# Altium PCB 175-00003, rev 2, Sinistro ASP.PcbDoc (part 2 of 5)
Units mil, origin at the board's own origin, x right, y up, seen from the top; angles counter-clockwise.
Board outline 5905.51 x 4330.71 mil, 8 copper layers (Top Layer (.GTL), MidLayer1 (.G1), +28V and VCC (.GP1), A and D grounds (.GP2), Earth GND (.GP3), +5ANA (.GP4), -5ANA (.GP5), Bottom Layer (.GBL)); 381 components, 275 nets, 1751 pads, 519 vias.
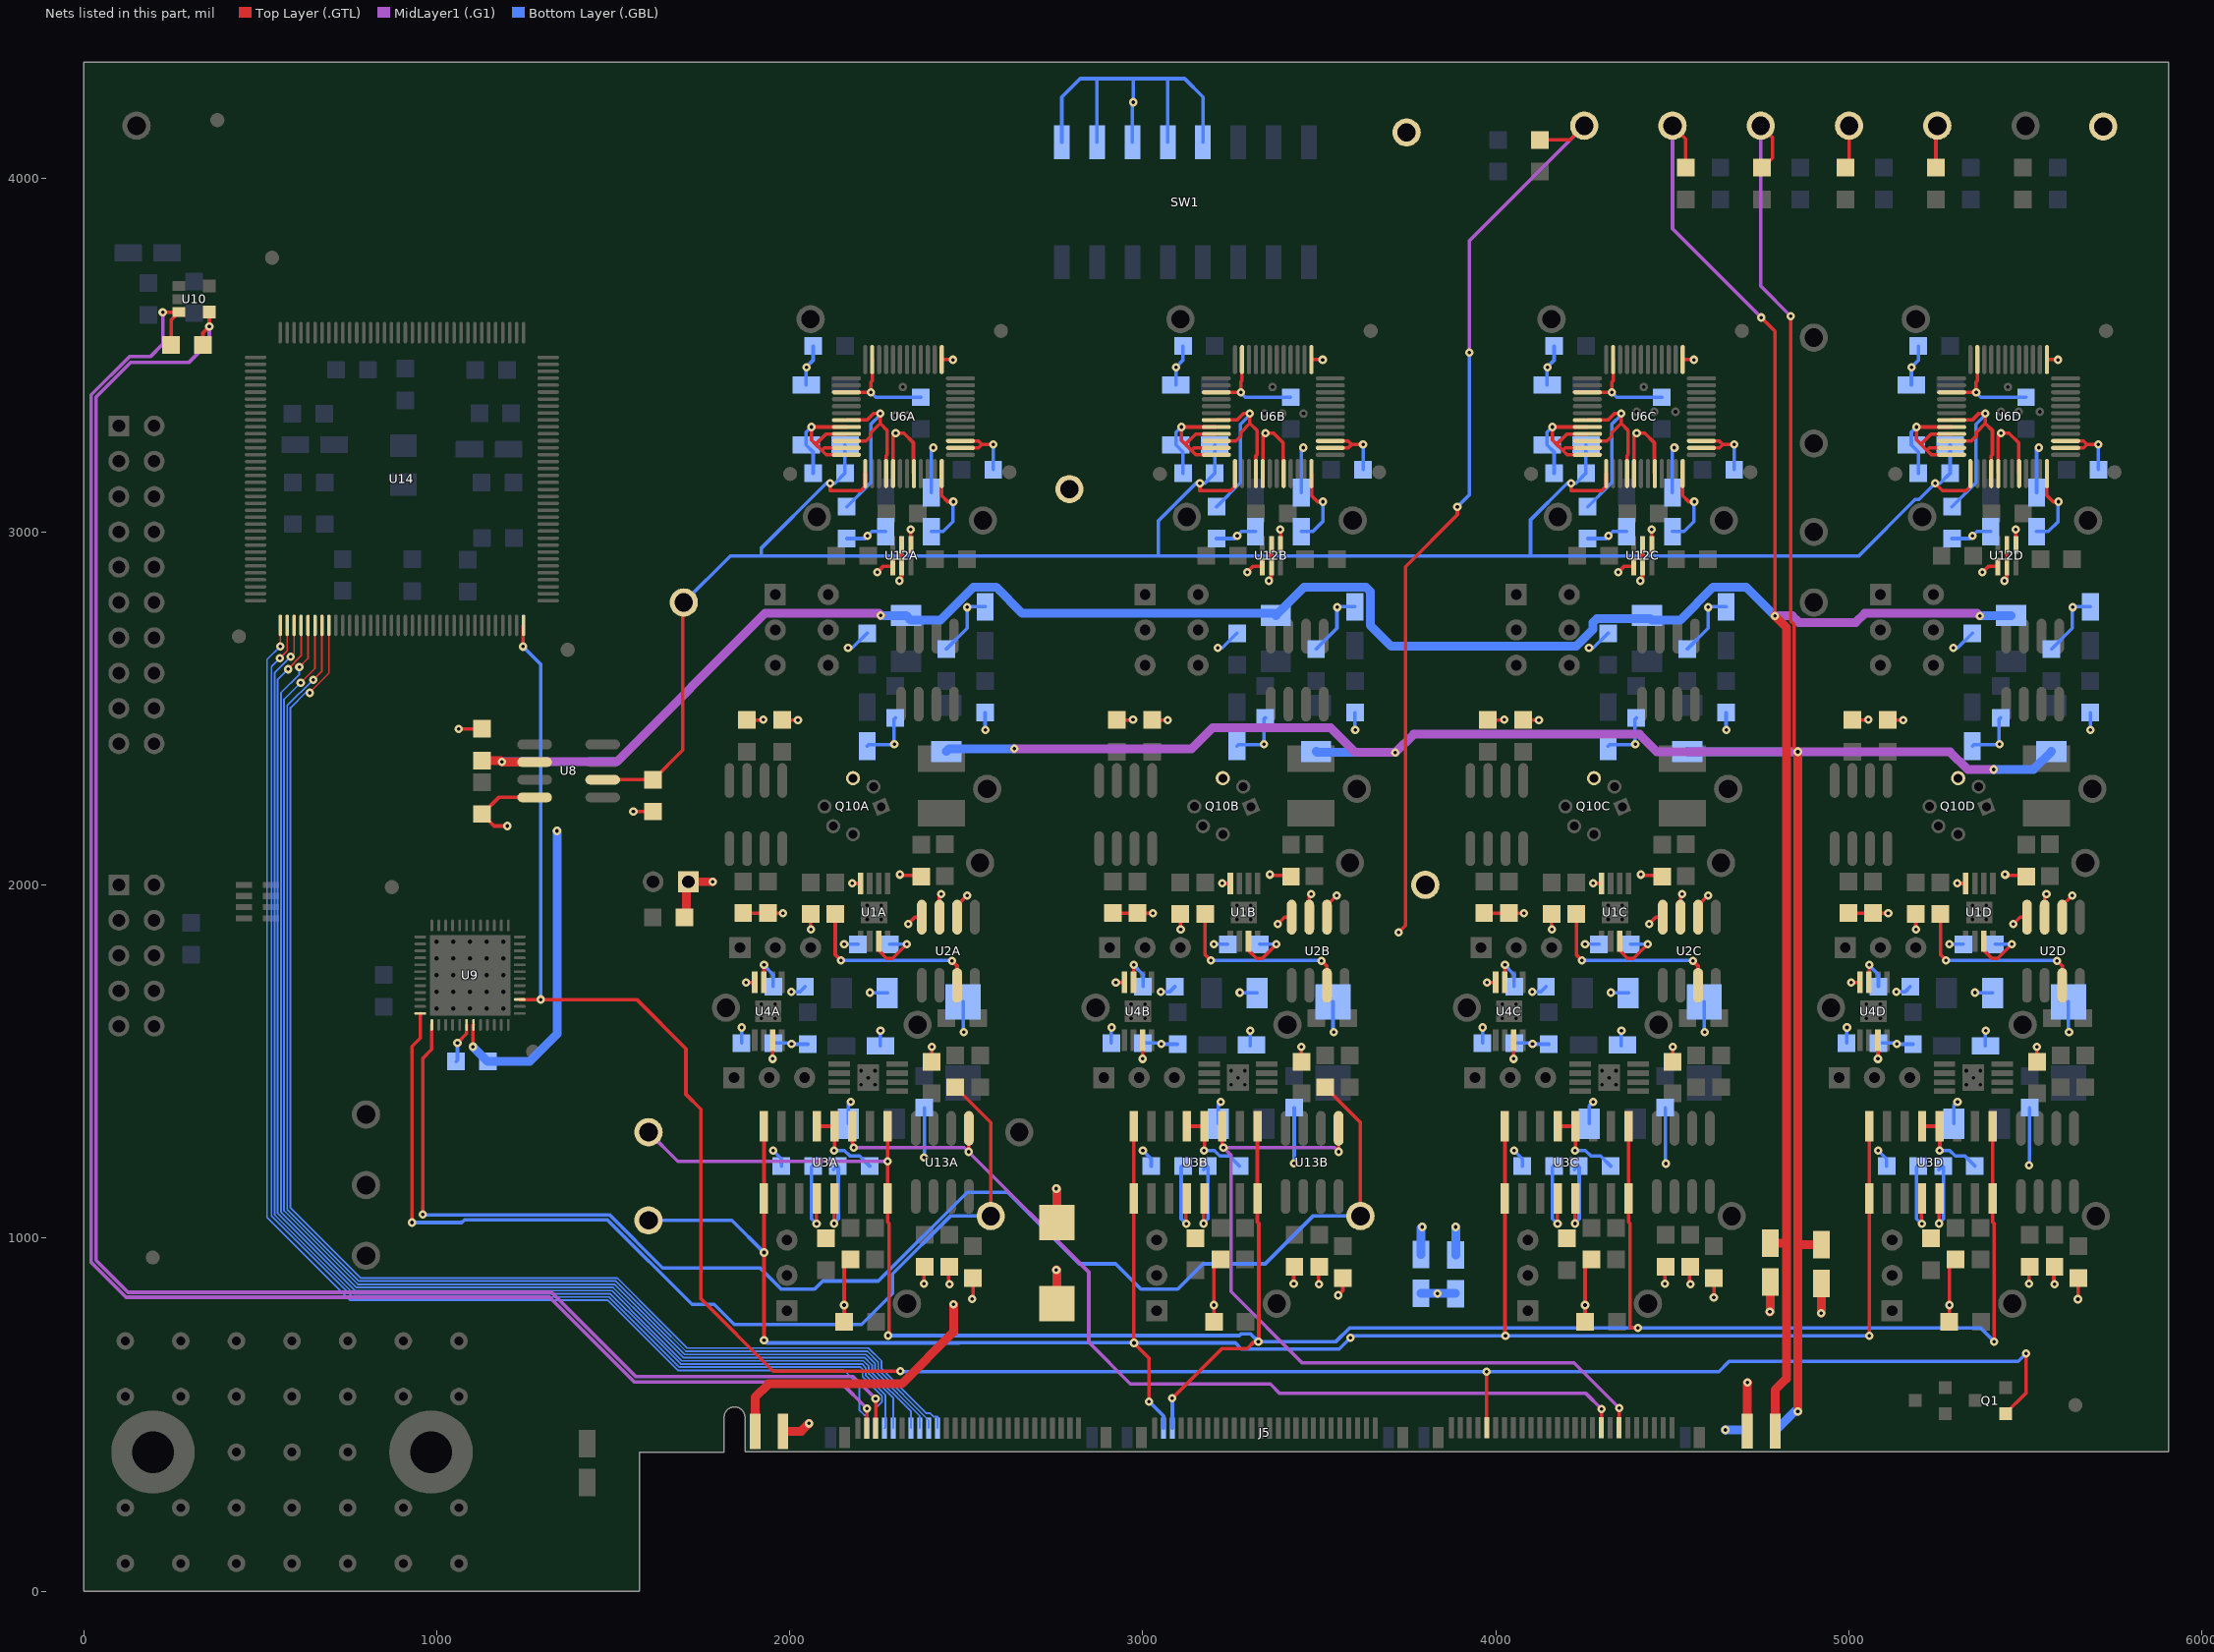
[diagram p8: the nets of this part, all layers, seen from the top]

## Part data
C1A C1B C1C C1D C2 C7 C8A C8B C8C C8D C12A C12B C12C C12D C17A C17B C17C C17D C18A C18B C18C C18D C19A C19B C19C C19D C20A C20B C20C C20D C22A C22B C22C C22D C23A C23B C23C C23D C25A C25B C25C C25D C26A C26B C26C C26D C27 C28A C28B C28C C28D C29A C29B C29C C29D C33 C34 C35 C36 C37 C38 C39 C40 C41 C42 C43 C47 C49A C49B C49C C49D C50 C51 C52 C56 C60 C61: "Capacitor"
C3A C3B C3C C3D C4A C4B C4C C4D C5A C5B C5C C5D C6A C6B C6C C6D C9A C9B C9C C9D C11A C11B C11C C11D C13A C13B C13C C13D C14A C14B C14C C14D C46A C46B C46C C46D: library part "Cap SMD", "Capacitor"
C10A C10B C10C C10D C59: library part "Cap Tant 35V", "outline 6.0mm x 3.2mm"
C15A C15B C15C C15D C16A C16B C16C C16D C21A C21B C21C C21D C24A C24B C24C C24D C31A C31B C31C C31D C32 C44 C45 C48A C48B C48C C48D C53 C54 C55 C57 C58: library part "Cap Tant 15V", "outline 3.2mm x 1.6mm"
C30A C30B C30C C30D: library part "Cap Pol1"
D1 D2 D3 D4 D5 D6: "Typical BLUE SiC LED"
J5: library part QMSS-EM-PC4, "SAMTEC QMSS EDGE W/PWR PINS"
L5: library part INDUCTOR1
P1: "Header, 10-Pin, Dual row"
P2: "Header, 2-Pin"
P3: "Header, 5-Pin, Dual row"
Q1: "P-MOSFET LOGIC LEVEL"
Q10A Q10B Q10C Q10D: "N-JFET NJ450L Process"
R1A R1B R1C R1D R2A R2B R2C R2D R5A R5B R5C R5D: library part "Res Match Pair"
R3A R3B R3C R3D R4A R4B R4C R4D R6A R6B R6C R6D R7A R7B R7C R7D R9A R9B R9C R9D R10A R10B R10C R10D R11A R11B R11C R11D R12A R12B R12C R12D R13A R13B R13C R13D R14A R14B R14C R14D R15A R15B R15C R15D R16A R16B R16C R16D R17A R17B R17C R17D R20A R20B R20C R20D R21 R22 R23 R24 R25 R26 R27: "Resistor"
R8A R8B R8C R8D: library part "Res Matched Quad", "TCR matched"
R18A R18B R18C R18D R19A R19B R19C R19D: library part Res2, "Resistor"
RN1: "Resistor Array 4 Isolated"
SW1: "SW-SMD 8-pos SPST"
TP1A TP1B TP1C TP1D TP2A TP2B TP2C TP2D TP3A TP3B TP3C TP3D TP4A TP4B TP4C TP4D TP5A TP5B TP5C TP5D TP6A TP6B TP6C TP6D TP7A TP7B TP7C TP7D TP8 TP9A TP9B TP9C TP9D TP10A TP10B TP10C TP10D TP19 TP20 TP21 TP22 TP23 TP24 TP26: "Test Point"
TP11 TP12 TP13 TP14 TP15 TP16 TP17 TP18 TP25 TP27 TP28 TP29 TP30 TP31: library part "Test point", "Test Point"
U1A U1B U1C U1D U4A U4B U4C U4D U5A U5B U5C U5D: "Low Noise, High Speed Amplifier"
U3A U3B U3C U3D: "DG213 QUAD NO/NC"
U6A U6B U6C U6D: library part ADS8422, "AD8422"
U7A U7B U7C U7D: "DIFF AMP"
U8: library part MAX6341, "VREF 4.096V 0.5ppm"
U9: "12-Bit MultChan ADC/DAC"
U10: "LVDS RECIEVER"
U11A U11B U11C U11D U13A U13B U13C U13D: "Dual Matched NPN"
U12A U12B U12C U12D: "Dual series array"
U14: "MAX II 3.3/2.5V CPLD, 116 IOs, 570 Logic Elements, 144-Pin Plastic TQFP, Commercial Temperature, Speed Grade 3"
U15: "Silicon Serial Number"

## Free pads (board coordinates)
  round 50 hole 25: 0(118.11,78.74) 0(118.11,236.22) 0(118.11,551.18) 0(118.11,708.66) 0(275.59,78.74) 0(275.59,236.22) 0(275.59,551.18) 0(275.59,708.66) 1(433.07,78.74) 1(433.07,236.22) 1(433.07,393.7) 1(433.07,551.18) 1(433.07,708.66) 2(590.55,78.74) 2(590.55,236.22) 2(590.55,393.7) 2(590.55,551.18) 2(590.55,708.66) 3(748.03,78.74) 3(748.03,236.22) 3(748.03,393.7) 3(748.03,551.18) 3(748.03,708.66) 4(905.51,78.74) 4(905.51,236.22) 4(905.51,551.18) 4(905.51,708.66) 5(1062.99,78.74) 5(1062.99,236.22) 5(1062.99,551.18) 5(1062.99,708.66)
  round 236.22 hole 118.11: 0(196.85,393.7) 1(984.25,393.7)
  round 24 hole 10: 1(2320.08,3410) 1(3367.32,3410) 1(4418.5,3410) 1(5450,3410) 2(2300,3330) 2(3345,3335) 2(4398.5,3340) 2(5430,3340) 3(3455,3335) 3(4508.5,3340) 3(5540,3340) 4(2335,3330) 4(3395,3335) 4(4448.5,3340) 4(5480,3340)
  round 40 smd mask+40: ""(196,945) ""(379,4166) ""(5641,527)
  round 40 smd mask+20: ""(440,2704) ""(534,3776) ""(873,1994) ""(1273,1528) ""(1371,2666) ""(2001,3164) ""(2598,3569) ""(2622,3169) ""(3048.24,3164) ""(3645.24,3569) ""(3669.24,3169) ""(4099.43,3164) ""(4696.43,3569) ""(4720.43,3169) ""(5130.92,3164) ""(5727.92,3569) ""(5751.92,3169)

## Via types
v1: diameter 24, hole 10, Top Layer (.GTL) to Bottom Layer (.GBL), tented both sides, 519 vias

## Nets (pads, with @x,y where several pads share a name; then routed paths per layer and width w, separated by ;. In a path a pad name is that pad's centre, name@x,y a point inside that pad or via, vN(x,y) a via of type N, cw(c..) or ccw(c..) an arc to the next point about the centre after c; other vN are vias at no path point)
4.096VREF: C7.2 C24A.1 C24B.1 C24C.1 C24D.1 C25A.2 C25B.2 C25C.2 C25D.2 TP8.1 U6A.1 U6B.1 U6C.1 U6D.1 U8.6 | length 6339.8
  Top Layer (.GTL) w10: U8.6@1470.46,2298 C7.2@1613,2298 1697,2382 TP8.1@1697,2800 ; 2114.17,3117.05 2201.36,3117.05 2213.83,3129.52 U6A.1@2213.83,3164.9 ; 2114.17,3117.88 v1(2114.17,3137.79) ; 3161.42,3117.05 3248.61,3117.05 3261.07,3129.52 U6B.1@3261.07,3164.9 ; 3161.42,3117.47 v1(3161.42,3137.79) ; 4212.6,3117.05 4299.79,3117.05 4312.25,3129.52 U6C.1@4312.25,3164.9 ; 4212.6,3119.65 v1(4212.6,3137.79) ; v1(5244.09,3137.79) 5264.83,3117.05 5331.28,3117.05 5343.75,3129.52 U6D.1@5343.75,3164.9
  Bottom Layer (.GBL) w10: TP8.1@1700,2800 1832,2932 1920,2932 ; C24A.1@2156.36,3246.05 C25A.2@2156.36,3166.05 2128.1,3137.79 v1(2114.17,3137.79) 2103.27,3137.79 1920,2954.52 1920,2932 ; C24B.1@3203.61,3246.05 C25B.2@3203.61,3166.05 3175.35,3137.79 v1(3161.42,3137.79) 3150.51,3137.79 3044,3031.28 3044,2932 ; C24C.1@4254.79,3246.05 C25C.2@4254.79,3166.05 4226.53,3137.79 v1(4212.6,3137.79) 4201.7,3137.79 4098,3034.1 4098,2932 ; C24D.1@5286.28,3246.05 C25D.2@5286.28,3166.05 5258.02,3137.79 v1(5244.09,3137.79) 5197.62,3091.32 5186.72,3091.32 5027.4,2932 4098,2932 ; 1920,2932 3044,2932 ; 3044,2932 4098,2932
+5ANA: C5A.2 C5B.2 C5C.2 C5D.2 C11A.2 C11B.2 C11C.2 C11D.2 C20A.2 C20B.2 C20C.2 C20D.2 C21A.1 C21B.1 C21C.1 C21D.1 C35.2 C58.1 D5.ANOD J5.PC03 R3A.1 R3B.1 R3C.1 R3D.1 R4A.1 R4B.1 R4C.1 R4D.1 TP27.1 U2A.7 U2B.7 U2C.7 U2D.7 U3A.12 U3B.12 U3C.12 U3D.12 U4A.7 U4B.7 U4C.7 U4D.7 U6A.4 U6A.43 U6A.46 U6B.4 U6B.43 U6B.46 U6C.4 U6C.43 U6C.46 U6D.4 U6D.43 U6D.46 U9.18 U12A.2 U12A.5 U12B.2 U12B.5 U12C.2 U12C.5 U12D.2 U12D.5 | length 7917.7
  Top Layer (.GTL) w10: v1(1059,1553) 1084.65,1578.65 U9.18@1084.65,1603.74 ; v1(1951.89,1507.53) U4A.7@1951.89,1560.63 ; U3A.12@2075.09,1111.96 2075.09,1041.32 v1(2076.09,1040.32) ; R4A.1@2129.09,1917.32 2129.09,1802.32 v1(2145.09,1786.32) ; U6A.46@2160.68,3257.42 2216.2,3257.42 2230.09,3271.32 2230.09,3281.27 2255.91,3307.09 ; U6A.43@2160.68,3316.48 2218.94,3316.48 2237.1,3334.64 v1(2255.91,3334.64) 2255.91,3307.09 ; U6A.4@2272.88,3164.9 2272.88,3215.11 2276.09,3218.32 2276.09,3286.9 2255.91,3307.09 ; v1(2310.09,2861.32) 2317.09,2868.32 U12A.5@2317.09,2962.83 ; v1(2312.09,2029.32) 2314.09,2027.32 R3A.1@2359.09,2027.32 ; v1(2459.09,1785.32) 2474.09,1770.32 U2A.7@2474.09,1715.87 ; v1(2999.13,1507.53) U4B.7@2999.13,1560.63 ; U3B.12@3122.34,1111.96 3122.34,1041.32 v1(3123.34,1040.32) ; R4B.1@3176.34,1917.32 3176.34,1802.32 v1(3192.34,1786.32) ; U6B.46@3207.92,3257.42 3263.44,3257.42 3277.34,3271.32 3277.34,3281.27 3303.15,3307.09 ; U6B.43@3207.92,3316.48 3266.18,3316.48 3284.35,3334.64 v1(3303.15,3334.64) 3303.15,3307.09 ; U6B.4@3320.13,3164.9 3320.13,3215.11 3323.34,3218.32 3323.34,3286.9 3303.15,3307.09 ; v1(3357.34,2861.32) 3364.34,2868.32 U12B.5@3364.34,2962.83 ; v1(3359.34,2029.32) 3361.34,2027.32 R3B.1@3406.34,2027.32 ; v1(3506.34,1785.32) 3521.34,1770.32 U2B.7@3521.34,1715.87 ; v1(4050.31,1507.53) U4C.7@4050.31,1560.63 ; U3C.12@4173.52,1111.96 4173.52,1041.32 v1(4174.52,1040.32) ; R4C.1@4227.52,1917.32 4227.52,1802.32 v1(4243.52,1786.32) ; U6C.46@4259.1,3257.42 4314.62,3257.42 4328.52,3271.32 4328.52,3281.27 4354.33,3307.09 ; U6C.43@4259.1,3316.48 4317.36,3316.48 4335.53,3334.64 v1(4354.33,3334.64) 4354.33,3307.09 ; U6C.4@4371.31,3164.9 4371.31,3215.11 4374.52,3218.32 4374.52,3286.9 4354.33,3307.09 ; v1(4408.52,2861.32) 4415.52,2868.32 U12C.5@4415.52,2962.83 ; v1(4410.52,2029.32) 4412.52,2027.32 R3C.1@4457.52,2027.32 ; v1(4557.52,1785.32) 4572.52,1770.32 U2C.7@4572.52,1715.87 ; D5.ANOD@4990.16,4031.22 5000,4041.06 TP27.1@5000,4150 ; v1(5081.81,1507.53) U4D.7@5081.81,1560.63 ; U3D.12@5205.02,1111.96 5205.02,1041.32 v1(5206.02,1040.32) ; R4D.1@5259.02,1917.32 5259.02,1802.32 v1(5275.02,1786.32) ; U6D.46@5290.6,3257.42 5346.12,3257.42 5360.02,3271.32 5360.02,3281.27 5385.83,3307.09 ; U6D.43@5290.6,3316.48 5348.86,3316.48 5367.02,3334.64 v1(5385.83,3334.64) 5385.83,3307.09 ; U6D.4@5402.8,3164.9 5402.8,3215.11 5406.02,3218.32 5406.02,3286.9 5385.83,3307.09 ; v1(5440.02,2861.32) 5447.02,2868.32 U12D.5@5447.02,2962.83 ; v1(5442.02,2029.32) 5444.02,2027.32 R3D.1@5489.02,2027.32 ; v1(5589.02,1785.32) 5604.02,1770.32 U2D.7@5604.02,1715.87
  Top Layer (.GTL) w25: J5.PC03@4712.01,484.84 J5.PC03@4712.01,453.35 4712.01,589.96 v1(4712.6,590.55)
  Bottom Layer (.GBL) w10: C35.2@1055,1500 1059,1504 v1(1059,1553) ; v1(2003.94,1696.85) 2028.16,1696.85 C11A.2@2043.36,1712.05 ; C5A.2@2064.36,1204.05 2061.36,1201.05 2061.36,1054.05 v1@2075.36,1040.05 ; v1@2144.36,1786.05 2457.36,1786.05 v1@2458.36,1785.05 ; C20A.2@2161.36,3071.05 2229.36,3139.05 2229.36,3304.16 2255.91,3330.71 v1(2255.91,3334.64) ; C21A.1@2401.36,3111.05 2401.36,3233.05 v1@2406.36,3238.05 ; v1(3051.18,1696.85) 3075.4,1696.85 C11B.2@3090.61,1712.05 ; C5B.2@3111.61,1204.05 3108.61,1201.05 3108.61,1054.05 v1@3122.61,1040.05 ; v1@3191.61,1786.05 3504.61,1786.05 v1@3505.61,1785.05 ; C20B.2@3208.61,3071.05 3276.61,3139.05 3276.61,3304.16 3303.15,3330.71 v1(3303.15,3334.64) ; C21B.1@3448.61,3111.05 3448.61,3233.05 v1@3453.61,3238.05 ; v1(4102.36,1696.85) 4126.58,1696.85 C11C.2@4141.79,1712.05 ; C5C.2@4162.79,1204.05 4159.79,1201.05 4159.79,1054.05 v1@4173.79,1040.05 ; v1@4242.79,1786.05 4555.79,1786.05 v1@4556.79,1785.05 ; C20C.2@4259.79,3071.05 4327.79,3139.05 4327.79,3304.16 4354.33,3330.71 v1(4354.33,3334.64) ; C21C.1@4499.79,3111.05 4499.79,3233.05 v1@4504.79,3238.05 ; v1(5133.86,1696.85) 5158.08,1696.85 C11D.2@5173.28,1712.05 ; C5D.2@5194.28,1204.05 5191.28,1201.05 5191.28,1054.05 v1@5205.28,1040.05 ; v1@5274.28,1786.05 5587.28,1786.05 v1@5588.28,1785.05 ; C20D.2@5291.28,3071.05 5359.28,3139.05 5359.28,3304.16 5385.83,3330.71 v1(5385.83,3334.64) ; C21D.1@5531.28,3111.05 5531.28,3233.05 v1@5536.28,3238.05
  Bottom Layer (.GBL) w25: C58.1@3788,953 3788,1028.16 v1(3791.34,1031.5)
  other v1: 2145.09,1786.32 3192.34,1786.32 4243.52,1786.32 5275.02,1786.32 2407.09,3238.32 3454.34,3238.32 4505.52,3238.32 5537.02,3238.32
+12V: C57.1 C60.2 D4.ANOD J5.PC01 L3A.1 L3B.1 L3C.1 L3D.1 TP25.1 U8.2 | length 9002.9
  Top Layer (.GTL) w10: TP25.1@4500,4150 4537.4,4112.6 D4.ANOD@4537.4,4031.22 ; v1(4751,3607) 4790,3568 v1(4790,2762)
  Top Layer (.GTL) w25: C60.2@1129,2352 1182,2352 v1(1185,2349) 1186,2348 U8.2@1277.54,2348 ; C57.1@4777,985 4819.65,985 4822.83,988.19 ; v1(4790,2762) 4822.83,2729.17 4822.83,988.19 ; J5.PC01@4790.91,454.26 J5.PC01@4790.91,453.35 4790.91,569.69 4822.83,601.62 4822.83,988.19
  MidLayer1 (.G1) w10: TP25.1@4500,4150 4500,3858 v1(4751,3607)
  MidLayer1 (.G1) w25: v1(1185,2349) 1510,2349 1929.82,2768.82 2252.18,2768.82 v1(2258,2763) ; v1(4790,2762) 4839.6,2762 4858.1,2743.5 5019.11,2743.5 5044.43,2768.82 5363.18,2768.82 v1(5370,2762)
  Bottom Layer (.GBL) w25: v1(2258,2763) 2258.05,2763.05 L3A.1@2329.36,2763.05 2342.59,2749.82 2426.29,2749.82 2520.02,2843.55 2584.2,2843.55 2658.93,2768.82 3370.84,2768.82 L3B.1@3376.61,2763.05 3457.11,2843.55 3631.44,2843.55 3644,2831 3644,2735.95 3704.13,2675.82 4226.78,2675.82 4274.74,2723.78 4274.74,2743.34 4285.95,2754.55 4436.29,2754.55 4441.02,2749.82 4521.33,2749.82 4615.06,2843.55 4708.45,2843.55 v1(4790,2762) ; v1(5370,2762) 5458.23,2762 L3D.1@5459.28,2763.05
+28V: C3A.2 C3B.2 C3C.2 C3D.2 C4A.2 C4B.2 C4C.2 C4D.2 C59.POS D3.ANOD J5.PC05 L1A.2 L1B.2 L1C.2 L1D.2 R13A.2 R13B.2 R13C.2 R13D.2 R14A.2 R14B.2 R14C.2 R14D.2 TP28.1 U1A.7 U1B.7 U1C.7 U1D.7 U3A.13 U3B.13 U3C.13 U3D.13 | length 5039.9
  Top Layer (.GTL) w10: v1(2125.09,1041.32) U3A.13@2125.09,1111.96 ; U1A.7@2251.89,1840.63 2251.89,1815.11 2274.67,1792.32 2291.09,1792.32 v1(2331.09,1832.32) ; R14A.2@2450.09,919.32 2450.09,871.32 v1(2452.09,869.32) ; v1(3172.34,1041.32) U3B.13@3172.34,1111.96 ; U1B.7@3299.13,1840.63 3299.13,1815.11 3321.92,1792.32 3338.34,1792.32 v1(3378.34,1832.32) ; R14B.2@3497.34,919.32 3497.34,871.32 v1(3499.34,869.32) ; v1(3724.41,1866.14) 3743.5,1885.23 3743.5,2901.23 3890.7,3048.44 v1(3890.7,3070.87) ; D3.ANOD@4124.02,4109.96 4209.96,4109.96 TP28.1@4250,4150 ; v1(4223.52,1041.32) U3C.13@4223.52,1111.96 ; U1C.7@4350.31,1840.63 4350.31,1815.11 4373.1,1792.32 4389.52,1792.32 v1(4429.52,1832.32) ; R14C.2@4548.52,919.32 4548.52,871.32 v1(4550.52,869.32) ; v1(5255.02,1041.32) U3D.13@5255.02,1111.96 ; U1D.7@5381.81,1840.63 5381.81,1815.11 5404.59,1792.32 5421.02,1792.32 v1(5461.02,1832.32) ; R14D.2@5580.02,919.32 5580.02,871.32 v1(5582.02,869.32)
  Top Layer (.GTL) w25: J5.PC05@1980.91,452.85 2032.85,452.85 v1(2055,475) ; v1(2755,910) 2756,909 C59.POS@2756,814
  MidLayer1 (.G1) w10: v1(3925.2,3507.87) 3925.2,3825.2 TP28.1@4250,4150
  Bottom Layer (.GBL) w10: v1@2124.36,1041.05 2137.36,1054.05 2137.36,1201.05 C4A.2@2134.36,1204.05 ; C4A.2@2124.36,1194.05 C4A.2@2134.36,1204.05 ; C4A.2@2136.36,1202.05 C4A.2@2134.36,1204.05 ; L1A.2@2166.36,1324.05 2166.36,1378.96 2177.17,1389.76 v1(2173.22,1385.82) ; C3A.2@2283.36,1832.05 v1@2330.36,1832.05 ; v1@3171.61,1041.05 3184.61,1054.05 3184.61,1201.05 C4B.2@3181.61,1204.05 ; C4B.2@3171.61,1194.05 C4B.2@3181.61,1204.05 ; C4B.2@3183.61,1202.05 C4B.2@3181.61,1204.05 ; L1B.2@3213.61,1324.05 3213.61,1378.96 v1(3220.47,1385.83) ; C3B.2@3330.61,1832.05 v1@3377.61,1832.05 ; v1(3890.7,3070.87) 3925.2,3105.36 v1(3925.2,3507.87) ; v1@4222.79,1041.05 4235.79,1054.05 4235.79,1201.05 C4C.2@4232.79,1204.05 ; C4C.2@4222.79,1194.05 C4C.2@4232.79,1204.05 ; C4C.2@4234.79,1202.05 C4C.2@4232.79,1204.05 ; L1C.2@4264.79,1324.05 4264.79,1375.02 v1(4275.59,1385.83) ; C3C.2@4381.79,1832.05 v1@4428.79,1832.05 ; v1@5254.28,1041.05 5267.28,1054.05 5267.28,1201.05 C4D.2@5264.28,1204.05 ; C4D.2@5254.28,1194.05 C4D.2@5264.28,1204.05 ; C4D.2@5266.28,1202.05 C4D.2@5264.28,1204.05 ; L1D.2@5296.28,1324.05 5296.28,1375.02 v1(5307.09,1385.83) ; C3D.2@5413.28,1832.05 v1@5460.28,1832.05
  other v1: 2452.09,869.32 3499.34,869.32 4550.52,869.32 5582.02,869.32
+CLK_100: J5.153 R21.1 U10.3 | length 5382.4
  Top Layer (.GTL) w10: v1(224.15,3622.25) U10.3@270.15,3622.25 248.15,3600.25 R21.1@248.15,3529.25 ; J5.153@2218.41,461.79 2218.41,516.41 v1(2219,517)
  MidLayer1 (.G1) w10: v1(224.15,3622.25) 224.15,3531.24 188.98,3496.06 129.81,3496.06 21.43,3387.69 21.43,931.21 120.19,832.46 1319.74,832.46 1559.2,593 2143,593 v1(2219,517)
-5ANA: C14A.2 C14B.2 C14C.2 C14D.2 C46A.1 C46B.1 C46C.1 C46D.1 C53.2 D2.CATH J5.PC04 L2A.2 L2B.2 L2C.2 L2D.2 R15A.2 R15B.2 R15C.2 R15D.2 R16A.2 R16B.2 R16C.2 R16D.2 TP30.1 U2A.3 U2B.3 U2C.3 U2D.3 U4A.4 U4B.4 U4C.4 U4D.4 | length 1646.8
  Top Layer (.GTL) w10: R16A.2@1868.09,1920.32 v1(1981.09,1920.32) ; v1(1876.4,1724.01) U4A.4@1900.71,1724.01 ; R15A.2@1879.09,2467.32 1924.09,2467.32 v1(1925.09,2468.32) ; U2A.3@2424.09,1908.78 2424.09,1969.32 v1(2429.09,1974.32) ; R16B.2@2915.34,1920.32 v1(3028.34,1920.32) ; v1(2923.65,1724.01) U4B.4@2947.95,1724.01 ; R15B.2@2926.34,2467.32 2971.34,2467.32 v1(2972.34,2468.32) ; U2B.3@3471.34,1908.78 3471.34,1969.32 v1(3476.34,1974.32) ; R16C.2@3966.52,1920.32 v1(4079.52,1920.32) ; v1(3974.83,1724.01) U4C.4@3999.13,1724.01 ; R15C.2@3977.52,2467.32 4022.52,2467.32 v1(4023.52,2468.32) ; U2C.3@4522.52,1908.78 4522.52,1969.32 v1(4527.52,1974.32) ; R16D.2@4998.02,1920.32 v1(5111.02,1920.32) ; v1(5006.32,1724.01) U4D.4@5030.63,1724.01 ; R15D.2@5009.02,2467.32 5054.02,2467.32 v1(5055.02,2468.32) ; D2.CATH@5246.06,4031.22 5246.06,4146.06 TP30.1@5250,4150 ; U2D.3@5554.02,1908.78 5554.02,1969.32 v1(5559.02,1974.32)
  Bottom Layer (.GBL) w10: C14A.2@1863.36,1552.05 v1@1863.36,1596.05 ; v1@2226.36,1695.05 2227.36,1694.05 L2A.2@2276.36,1694.05 ; C14B.2@2910.61,1552.05 v1@2910.61,1596.05 ; v1@3273.61,1695.05 3274.61,1694.05 L2B.2@3323.61,1694.05 ; C14C.2@3961.79,1552.05 v1@3961.79,1596.05 ; v1@4324.79,1695.05 4325.79,1694.05 L2C.2@4374.79,1694.05 ; C14D.2@4993.28,1552.05 v1@4993.28,1596.05 ; v1@5356.28,1695.05 5357.28,1694.05 L2D.2@5406.28,1694.05
  Bottom Layer (.GBL) w25: v1(3885.83,1031.5) 3886,1031.32 C53.2@3886,952 ; v1(4649.61,456.69) 4708.66,456.69 J5.PC04@4712.01,453.35
  other v1: 1864.09,1596.32 2911.34,1596.32 3962.52,1596.32 4994.02,1596.32 2227.09,1695.32 3274.34,1695.32 4325.52,1695.32 5357.02,1695.32
-12V: C54.2 D1.CATH J5.PC02 L4A.1 L4B.1 L4C.1 L4D.1 TP31.1 | length 7795.1
  Top Layer (.GTL) w10: TP31.1@4750,4150 4783.46,4116.54 4783.46,4059.06 4755.63,4031.22 D1.CATH@4753.94,4031.22 ; v1(4835,3611) 4835,2747.41 4844.33,2738.07 4844.33,2387.67 v1(4855,2377)
  Top Layer (.GTL) w25: v1(4855,509) 4855,980.32 ; v1(4855,2377) 4855,980.32 ; C54.2@4922,982 4856.68,982 4855,980.32
  MidLayer1 (.G1) w10: TP31.1@4750,4150 4750,3696 v1(4835,3611)
  MidLayer1 (.G1) w25: v1(2636,2386) 3138,2386 3197,2445 3532,2445 3602,2375 v1(3715,2375) 3766.82,2426.82 4406.33,2426.82 4456.15,2377 v1(4855,2377) 5285.96,2377 5335.96,2327 v1(5410,2327)
  Bottom Layer (.GBL) w25: L4A.1@2443.36,2378.05 2451.31,2386 v1(2636,2386) ; L4B.1@3490.61,2378.05 3493.66,2375 v1(3715,2375) ; L4C.1@4541.79,2378.05 4542.84,2377 v1(4855,2377) ; J5.PC02@4790.91,453.35 4846.56,509 v1(4855,509) ; v1(5410,2327) 5522.23,2327 L4D.1@5573.28,2378.05
-CLK_100: J5.151 R21.2 U10.4 | length 5427.7
  Top Layer (.GTL) w10: R21.2@338.15,3529.25 338.15,3563.25 v1(356.15,3581.25) U10.4@356.15,3622.25 ; v1(2243,545) 2243.41,544.59 J5.151@2243.41,461.79
  MidLayer1 (.G1) w10: v1(356.15,3581.25) 356.15,3537.25 299.21,3480.32 133.86,3480.32 35.43,3381.89 35.43,937.01 125.98,846.46 1325.54,846.46 1564,608 2180,608 v1(2243,545)
/CKT_TEST: J5.100 TP20.1 U3A.1 U3A.16 U3B.1 U3B.16 U3C.1 U3C.16 U3D.1 U3D.16 | length 6695.5
  Top Layer (.GTL) w10: U3A.1@2277.09,1316.68 U3A.16@2277.09,1111.96 2277.09,1045.32 2281.09,1041.32 v1@2281.09,724 ; v1(3083,546) 3224,687 3295.7,687 3314.7,706 3328.34,706 3328.34,1041.32 3324.34,1045.32 U3B.16@3324.34,1111.96 U3B.1@3324.34,1316.68 ; U3C.1@4375.52,1316.68 U3C.16@4375.52,1111.96 4375.52,1045.32 4379.52,1041.32 4379.52,745 v1(4401.52,745) ; U3D.1@5407.02,1316.68 U3D.16@5407.02,1111.96 5407.02,1045.32 5411.02,1041.32 v1(5411.02,707)
  MidLayer1 (.G1) w10: TP20.1@1600,1300 1683,1217 v1(2277,1217)
  Bottom Layer (.GBL) w10: v1(2279,724) 3273.3,724 3278.3,729 3305,729 v1(3327,707) 3547,707 3585,745 v1(4401.52,745) 5373.02,745 v1(5411.02,707) ; v1(3083,546) 3083.56,545.44 J5.100@3083.56,461.79
/GAIN_4X: J5.102 TP21.1 U3A.8 U3A.9 U3B.8 U3B.9 U3C.8 U3C.9 U3D.8 U3D.9 | length 6213.5
  Top Layer (.GTL) w10: v1(1927.09,711) v1(1927.09,959) U3A.9@1927.09,1111.96 U3A.8@1927.09,1316.68 ; v1@2974.34,696 v1@2974.34,703 ; U3B.8@2974.34,1316.68 U3B.9@2974.34,1111.96 v1@2974.34,703 ; v1(3017,537) 3017,660.34 v1@2974.34,703 ; v1@4025.52,723 U3C.9@4025.52,1111.96 U3C.8@4025.52,1316.68 ; v1@5057.02,723 U3D.9@5057.02,1111.96 U3D.8@5057.02,1316.68
  Bottom Layer (.GBL) w10: TP21.1@1600,1050 1836.09,1050 v1(1927.09,959) ; v1(1927.09,711) 1935.09,703 2287.7,703 2288.7,704 2289.7,703 2478.3,703 2479.3,704 2974,704 v1(2975,703) 3262.3,703 3279.3,686 3556,686 v1(3588,718) 3593,723 v1(4027,723) v1(5057,723) v1@5057,724 ; v1(3017,537) 3018,537 3058.56,496.44 J5.102@3058.56,461.79
A: C3A.1 C3B.1 C3C.1 C3D.1 C4A.1 C4B.1 C4C.1 C4D.1 C5A.1 C5B.1 C5C.1 C5D.1 C7.1 C8A.1 C8B.1 C8C.1 C8D.1 C9A.2 C9B.2 C9C.2 C9D.2 C10A.NEG C10B.NEG C10C.NEG C10D.NEG C11A.1 C11B.1 C11C.1 C11D.1 C12A.1 C12B.1 C12C.1 C12D.1 C13A.1 C13B.1 C13C.1 C13D.1 C14A.1 C14B.1 C14C.1 C14D.1 C15A.1 C15B.1 C15C.1 C15D.1 C16A.2 C16B.2 C16C.2 C16D.2 C17A.1 C17B.1 C17C.1 C17D.1 C18A.2 C18B.2 C18C.2 C18D.2 C19A.2 C19B.2 C19C.2 C19D.2 C20A.1 C20B.1 C20C.1 C20D.1 C21A.2 C21B.2 C21C.2 C21D.2 C22A.1 C22B.1 C22C.1 C22D.1 C23A.1 C23B.1 C23C.1 C23D.1 C24A.2 C24B.2 C24C.2 C24D.2 C25A.1 C25B.1 C25C.1 C25D.1 C26A.2 C26B.2 C26C.2 C26D.2 C28A.2 C28B.2 C28C.2 C28D.2 C29A.1 C29B.1 C29C.1 C29D.1 C30A.2 C30B.2 C30C.2 C30D.2 C31A.1 C31B.1 C31C.1 C31D.1 C35.1 C48A.2 C48B.2 C48C.2 C48D.2 C53.1 C54.1 C56.1 C57.2 C58.2 C59.NEG C60.1 C61.1 J5.PC07 P2.1 Q10A.3 Q10B.3 Q10C.3 Q10D.3 R11A.1 R11B.1 R11C.1 R11D.1 R12A.1 R12B.1 R12C.1 R12D.1 R17A.1 R17B.1 R17C.1 R17D.1 R20A.1 R20B.1 R20C.1 R20D.1 SW1.9 SW1.10 SW1.11 SW1.12 SW1.13 TP14.1 TP15.1 TP16.1 TP17.1 U1A.4 U1B.4 U1C.4 U1D.4 U2A.2 U2A.4 U2B.2 U2B.4 U2C.2 U2C.4 U2D.2 U2D.4 U3A.4 U3A.5 U3B.4 U3B.5 U3C.4 U3C.5 U3D.4 U3D.5 U4A.3 U4B.3 U4C.3 U4D.3 U6A.5 U6A.8 U6A.12 U6A.14 U6A.15 U6A.25 U6A.35 U6A.39 U6A.44 U6A.45 U6A.47 U6A.48 U6B.5 U6B.8 U6B.12 U6B.14 U6B.15 U6B.25 U6B.35 U6B.39 U6B.44 U6B.45 U6B.47 U6B.48 U6C.5 U6C.8 U6C.12 U6C.14 U6C.15 U6C.25 U6C.35 U6C.39 U6C.44 U6C.45 U6C.47 U6C.48 U6D.5 U6D.8 U6D.12 U6D.14 U6D.15 U6D.25 U6D.35 U6D.39 U6D.44 U6D.45 U6D.47 U6D.48 U8.4 U9.19 U12A.1 U12A.4 U12B.1 U12B.4 U12C.1 U12C.4 U12D.1 U12D.4 | length 19382.8
  Top Layer (.GTL) w10: v1(1062,2442) C60.1@1129,2442 ; v1(1103,1542) 1103,1602.41 U9.19@1104.33,1603.74 ; v1(1200,2167) 1163,2167 C61.1@1129,2201 1173,2245 1176,2248 U8.4@1277.54,2248 ; v1(1557,2208) C7.1@1613,2208 ; U4A.3@1926.3,1724.01 1927.09,1724.81 v1(1927.09,1773.32) ; R12A.1@1979.09,2467.32 2022.09,2467.32 v1(2023.09,2466.32) ; C8A.1@2059.09,1917.32 2059.09,1875.32 v1(2060.09,1874.32) ; U3A.5@2077.09,1316.68 U3A.4@2127.09,1316.68 2127.09,1249.15 v1(2125.97,1248.03) ; R11A.1@2154.09,762.32 v1(2154.09,810.32) 2154.09,923.32 C12A.1@2171.09,940.32 ; C12A.1@2157.09,926.32 2157.09,924.32 C12A.1@2172.09,939.32 ; U6A.48@2160.68,3218.05 2103.36,3218.05 2090.59,3230.82 ; U6A.47@2160.68,3237.74 2097.51,3237.74 2090.59,3230.82 ; U6A.45@2160.68,3277.11 2102.37,3277.11 2073.34,3248.08 ; U6A.44@2160.68,3296.79 v1(2061.57,3296.79) 2061.57,3259.85 2073.34,3248.08 ; U6A.39@2160.68,3395.22 v1@2229.99,3395.22 ; v1(2177.09,2004.32) 2177.4,2004.01 U1A.4@2200.71,2004.01 ; v1(2230.09,3395.32) v1@2229.99,3395.22 ; U6A.35@2233.51,3487.74 2233.51,3427.9 2229.99,3424.39 v1@2229.99,3395.22 ; v1(2248.03,2885.83) 2264.02,2901.81 2265.58,2901.81 ; 2265.09,2901.32 2265.58,2901.81 ; U12A.1@2291.5,2901.81 2265.58,2901.81 ; U6A.5@2292.57,3164.9 2292.57,3271.79 v1(2300.09,3279.32) 2323.09,3279.32 2350.31,3252.11 2350.31,3166.22 U6A.8@2351.62,3164.9 ; v1@2295.09,2397.32 v1(2296.09,2398.32) ; v1(2335.09,1889.32) 2354.55,1908.78 U2A.4@2374.09,1908.78 ; v1(2342.09,3006.32) 2342.28,3006.32 2342.68,3005.91 U12A.4@2342.68,2962.83 ; v1(2380.09,870.32) R20A.1@2380.09,919.32 ; R17A.1@2402.09,1499.32 v1(2402.09,1541.32) ; U6A.12@2430.36,3164.9 2430.36,3102.59 2447.63,3085.32 v1(2463.09,3085.32) ; U6A.25@2430.36,3487.74 2461.68,3487.74 v1(2462.09,3487.32) ; U2A.2@2474.09,1908.78 2474.09,1942.32 v1(2502.09,1970.32) ; U6A.14@2483.51,3237.74 2534.51,3237.74 2544.09,3247.32 ; U6A.15@2483.51,3257.42 2533.99,3257.42 2544.09,3247.32 ; v1(2503.09,2786.32) v1@2505.09,2786.32 ; v1(2517,828) 2519.09,830.09 C17A.1@2519.09,887.32 ; v1(2576.36,3247.05) 2576.09,3247.32 2544.09,3247.32 ; U4B.3@2973.54,1724.01 2974.34,1724.81 v1(2974.34,1773.32) ; R12B.1@3026.34,2467.32 3069.34,2467.32 v1(3070.34,2466.32) ; C8B.1@3106.34,1917.32 3106.34,1875.32 v1(3107.34,1874.32) ; U3B.5@3124.34,1316.68 U3B.4@3174.34,1316.68 3174.34,1249.15 v1(3173.22,1248.03) ; R11B.1@3201.34,762.32 v1(3201.34,810.32) 3201.34,923.32 C12B.1@3218.34,940.32 ; C12B.1@3204.34,926.32 3204.34,924.32 C12B.1@3219.34,939.32 ; U6B.48@3207.92,3218.05 3150.61,3218.05 3137.84,3230.82 ; U6B.47@3207.92,3237.74 3144.76,3237.74 3137.84,3230.82 ; U6B.45@3207.92,3277.11 3149.61,3277.11 3120.58,3248.08 ; U6B.44@3207.92,3296.79 v1(3108.81,3296.79) 3108.81,3259.85 3120.58,3248.08 ; U6B.39@3207.92,3395.22 v1@3277.24,3395.22 ; v1(3224.34,2004.32) 3224.65,2004.01 U1B.4@3247.95,2004.01 ; v1(3277.34,3395.32) v1@3277.24,3395.22 ; U6B.35@3280.76,3487.74 3280.76,3427.9 3277.24,3424.39 v1@3277.24,3395.22 ; v1(3295.28,2885.83) 3311.26,2901.81 3312.83,2901.81 ; 3312.34,2901.32 3312.83,2901.81 ; U12B.1@3338.75,2901.81 3312.83,2901.81 ; U6B.5@3339.81,3164.9 3339.81,3271.79 v1(3347.34,3279.32) 3370.34,3279.32 3397.55,3252.11 3397.55,3166.22 U6B.8@3398.87,3164.9 ; v1@3342.34,2397.32 v1(3343.34,2398.32) ; v1(3382.34,1889.32) 3401.8,1908.78 U2B.4@3421.34,1908.78 ; v1(3389.34,3006.32) 3389.52,3006.32 3389.93,3005.91 U12B.4@3389.93,2962.83 ; v1(3427.34,870.32) R20B.1@3427.34,919.32 ; R17B.1@3449.34,1499.32 v1(3449.34,1541.32) ; U6B.12@3477.61,3164.9 3477.61,3102.59 3494.87,3085.32 v1(3510.34,3085.32) ; U6B.25@3477.61,3487.74 3508.92,3487.74 v1(3509.34,3487.32) ; U2B.2@3521.34,1908.78 3521.34,1942.32 v1(3549.34,1970.32) ; U6B.14@3530.76,3237.74 3581.76,3237.74 3591.34,3247.32 ; U6B.15@3530.76,3257.42 3581.24,3257.42 3591.34,3247.32 ; v1(3550.34,2786.32) v1@3552.34,2786.32 ; v1(3553,838) 3566.34,851.34 C17B.1@3566.34,887.32 ; v1(3623.61,3247.05) 3623.34,3247.32 3591.34,3247.32 ; U4C.3@4024.72,1724.01 4025.52,1724.81 v1(4025.52,1773.32) ; R12C.1@4077.52,2467.32 4120.52,2467.32 v1(4121.52,2466.32) ; C8C.1@4157.52,1917.32 4157.52,1875.32 v1(4158.52,1874.32) ; U3C.5@4175.52,1316.68 U3C.4@4225.52,1316.68 4225.52,1249.15 v1(4224.4,1248.03) ; R11C.1@4252.52,762.32 v1(4252.52,810.32) 4252.52,923.32 C12C.1@4269.52,940.32 ; C12C.1@4255.52,926.32 4255.52,924.32 C12C.1@4270.52,939.32 ; U6C.48@4259.1,3218.05 4201.79,3218.05 4189.02,3230.82 ; U6C.47@4259.1,3237.74 4195.94,3237.74 4189.02,3230.82 ; U6C.45@4259.1,3277.11 4200.79,3277.11 4171.76,3248.08 ; U6C.44@4259.1,3296.79 v1(4159.99,3296.79) 4159.99,3259.85 4171.76,3248.08 ; U6C.39@4259.1,3395.22 v1@4328.42,3395.22 ; v1(4275.52,2004.32) 4275.83,2004.01 U1C.4@4299.13,2004.01 ; v1(4328.52,3395.32) v1@4328.42,3395.22 ; U6C.35@4331.94,3487.74 4331.94,3427.9 4328.42,3424.39 v1@4328.42,3395.22 ; v1(4346.46,2885.83) 4362.44,2901.81 4364.01,2901.81 ; 4363.52,2901.32 4364.01,2901.81 ; U12C.1@4389.93,2901.81 4364.01,2901.81 ; U6C.5@4390.99,3164.9 4390.99,3271.79 v1(4398.52,3279.32) 4421.52,3279.32 4448.73,3252.11 4448.73,3166.22 U6C.8@4450.05,3164.9 ; v1@4393.52,2397.32 v1(4394.52,2398.32) ; v1(4433.52,1889.32) 4452.98,1908.78 U2C.4@4472.52,1908.78 ; v1(4440.52,3006.32) 4440.7,3006.32 4441.11,3005.91 U12C.4@4441.11,2962.83 ; v1(4478.52,870.32) R20C.1@4478.52,919.32 ; R17C.1@4500.52,1499.32 v1(4500.52,1541.32) ; U6C.12@4528.79,3164.9 4528.79,3102.59 4546.05,3085.32 v1(4561.52,3085.32) ; U6C.25@4528.79,3487.74 4560.1,3487.74 v1(4560.52,3487.32) ; U2C.2@4572.52,1908.78 4572.52,1942.32 v1(4600.52,1970.32) ; U6C.14@4581.94,3237.74 4632.94,3237.74 4642.52,3247.32 ; U6C.15@4581.94,3257.42 4632.42,3257.42 4642.52,3247.32 ; v1(4601.52,2786.32) v1@4603.52,2786.32 ; v1(4617,832) 4617.52,832.52 C17C.1@4617.52,887.32 ; v1(4674.79,3247.05) 4674.52,3247.32 4642.52,3247.32 ; U4D.3@5056.22,1724.01 5057.02,1724.81 v1(5057.02,1773.32) ; R12D.1@5109.02,2467.32 5152.02,2467.32 v1(5153.02,2466.32) ; C8D.1@5189.02,1917.32 5189.02,1875.32 v1(5190.02,1874.32) ; U3D.5@5207.02,1316.68 U3D.4@5257.02,1316.68 5257.02,1249.15 v1(5255.89,1248.03) ; R11D.1@5284.02,762.32 v1(5284.02,810.32) 5284.02,923.32 C12D.1@5301.02,940.32 ; C12D.1@5287.02,926.32 5287.02,924.32 C12D.1@5302.02,939.32 ; U6D.48@5290.6,3218.05 5233.28,3218.05 5220.52,3230.82 ; U6D.47@5290.6,3237.74 5227.43,3237.74 5220.52,3230.82 ; U6D.45@5290.6,3277.11 5232.29,3277.11 5203.26,3248.08 ; U6D.44@5290.6,3296.79 v1(5191.49,3296.79) 5191.49,3259.85 5203.26,3248.08 ; U6D.39@5290.6,3395.22 v1@5359.91,3395.22 ; v1(5307.02,2004.32) 5307.32,2004.01 U1D.4@5330.63,2004.01 ; v1(5360.02,3395.32) v1@5359.91,3395.22 ; U6D.35@5363.43,3487.74 5363.43,3427.9 5359.91,3424.39 v1@5359.91,3395.22 ; v1(5377.95,2885.83) 5393.94,2901.81 5395.5,2901.81 ; 5395.02,2901.32 5395.5,2901.81 ; U12D.1@5421.42,2901.81 5395.5,2901.81 ; U6D.5@5422.49,3164.9 5422.49,3271.79 v1(5430.02,3279.32) 5453.02,3279.32 5480.23,3252.11 5480.23,3166.22 U6D.8@5481.54,3164.9 ; v1@5425.02,2397.32 v1(5426.02,2398.32) ; v1(5465.02,1889.32) 5484.47,1908.78 U2D.4@5504.02,1908.78 ; v1(5472.02,3006.32) 5472.2,3006.32 5472.61,3005.91 U12D.4@5472.61,2962.83 ; v1(5510.02,870.32) R20D.1@5510.02,919.32 ; R17D.1@5532.02,1499.32 v1(5532.02,1541.32) ; U6D.12@5560.28,3164.9 5560.28,3102.59 5577.55,3085.32 v1(5593.02,3085.32) ; U6D.25@5560.28,3487.74 5591.6,3487.74 v1(5592.02,3487.32) ; U2D.2@5604.02,1908.78 5604.02,1942.32 v1(5632.02,1970.32) ; U6D.14@5613.43,3237.74 5664.43,3237.74 5674.02,3247.32 ; U6D.15@5613.43,3257.42 5663.91,3257.42 5674.02,3247.32 ; v1(5633.02,2786.32) v1@5635.02,2786.32 ; v1(5648,827) 5649.02,828.02 C17D.1@5649.02,887.32 ; v1(5706.28,3247.05) 5706.02,3247.32 5674.02,3247.32 ; 2073.34,3248.08 2090.59,3230.82 ; 3120.58,3248.08 3137.84,3230.82 ; 4171.76,3248.08 4189.02,3230.82 ; 5203.26,3248.08 5220.52,3230.82
  Top Layer (.GTL) w25: C56.1@1702,1908 1708,1914 1708,2009 v1(1782,2009) ; J5.PC07@1902.01,452.85 1902.01,549.01 1940,587 2317.31,587 2464,733.69 v1(2464,812) ; v1(2755,1140) 2756,1139 C59.NEG@2756,1044 ; v1(4775.59,791.34) 4777,792.75 C57.2@4777,875 ; v1(4921.26,787.4) 4922,788.14 C54.1@4922,872
  Bottom Layer (.GBL) w10: v1@1926.36,1773.05 1953.36,1746.05 C11A.1@1953.36,1712.05 ; v1(1952.76,1248.03) 1976.36,1224.42 C5A.1@1976.36,1204.05 ; C14A.1@1953.36,1552.05 2001.36,1552.05 2004.36,1549.05 C13A.1@2051.36,1549.05 ; C30A.2@2046.36,3416.05 2046.36,3466.05 2066.36,3486.05 C29A.1@2066.36,3526.05 ; v1@2060.83,3296.53 2046.36,3282.05 C24A.2@2046.36,3246.05 2066.36,3226.05 C25A.1@2066.36,3166.05 ; v1(2125.97,1248.03) 2155.12,1248.03 2170.82,1232.32 2198.09,1232.32 C4A.1@2226.36,1204.05 ; v1@2153.36,1832.05 C3A.1@2193.36,1832.05 ; C20A.1@2161.36,2981.05 2212.36,2981.05 2232.36,3001.05 C48A.2@2271.36,3001.05 ; v1@2164.36,2671.05 2177.36,2671.05 C19A.2@2219.36,2713.05 ; C16A.2@2219.36,2393.05 2223.36,2397.05 v1@2294.36,2397.05 ; v1@2229.36,3395.05 2243.36,3381.05 C22A.1@2371.36,3381.05 ; C15A.1@2256.36,1544.05 v1@2256.36,1587.05 ; v1@2295.36,2398.05 2295.36,2469.05 C18A.2@2299.36,2473.05 ; v1(2380,1228) 2381.36,1229.36 C9A.2@2381.36,1369.05 ; C21A.2@2401.36,3001.05 2434.36,3001.05 2462.36,3029.05 v1@2462.36,3085.05 ; C28A.2@2443.36,2668.05 2502.36,2727.05 v1@2502.36,2786.05 ; C10A.NEG@2491.36,1669.05 2491.36,1584.05 v1@2492.36,1583.05 ; v1@2504.36,2786.05 2506.36,2788.05 C31A.1@2553.36,2788.05 ; v1@2553.36,2439.05 C26A.2@2553.36,2488.05 ; C23A.1@2576.36,3176.05 v1(2576.36,3247.05) v1@2576.36,3248.05 ; SW1.9@2770.46,4102.87 2770.46,4231.09 2822.83,4283.46 2972.44,4283.46 ; SW1.10@2870.46,4102.87 2870.46,4283.08 ; SW1.11@2970.46,4102.87 2970.46,4214.56 v1(2972.44,4216.54) 2972.44,4283.46 ; v1@2973.61,1773.05 3000.61,1746.05 C11B.1@3000.61,1712.05 ; v1(3000,1248.03) 3023.61,1224.42 C5B.1@3023.61,1204.05 ; C14B.1@3000.61,1552.05 3048.61,1552.05 3051.61,1549.05 C13B.1@3098.61,1549.05 ; SW1.12@3070.46,4102.87 3070.46,4283.06 3070.87,4283.46 ; C30B.2@3093.61,3416.05 3093.61,3466.05 3113.61,3486.05 C29B.1@3113.61,3526.05 ; v1@3108.08,3296.53 3093.61,3282.05 C24B.2@3093.61,3246.05 3113.61,3226.05 C25B.1@3113.61,3166.05 ; SW1.13@3170.46,4102.87 3170.46,4231.11 3118.11,4283.46 3070.87,4283.46 ; v1(3173.22,1248.03) 3202.36,1248.03 3218.07,1232.32 3245.34,1232.32 C4B.1@3273.61,1204.05 ; v1@3200.61,1832.05 C3B.1@3240.61,1832.05 ; C20B.1@3208.61,2981.05 3259.61,2981.05 3279.61,3001.05 C48B.2@3318.61,3001.05 ; v1@3211.61,2671.05 3224.61,2671.05 C19B.2@3266.61,2713.05 ; C16B.2@3266.61,2393.05 3270.61,2397.05 v1@3341.61,2397.05 ; v1@3276.61,3395.05 3290.61,3381.05 C22B.1@3418.61,3381.05 ; C15B.1@3303.61,1544.05 v1@3303.61,1587.05 ; v1@3342.61,2398.05 3342.61,2469.05 C18B.2@3346.61,2473.05 ; v1(3428,1212) 3428.61,1212.61 C9B.2@3428.61,1369.05 ; C21B.2@3448.61,3001.05 3481.61,3001.05 3509.61,3029.05 v1@3509.61,3085.05 ; C28B.2@3490.61,2668.05 3549.61,2727.05 v1@3549.61,2786.05 ; C10B.NEG@3538.61,1669.05 3538.61,1584.05 v1@3539.61,1583.05 ; v1@3551.61,2786.05 3553.61,2788.05 C31B.1@3600.61,2788.05 ; v1@3600.61,2439.05 C26B.2@3600.61,2488.05 ; C23B.1@3623.61,3176.05 v1(3623.61,3247.05) v1@3623.61,3248.05 ; v1@4024.79,1773.05 4051.79,1746.05 C11C.1@4051.79,1712.05 ; v1(4051.18,1248.03) 4074.79,1224.42 C5C.1@4074.79,1204.05 ; C14C.1@4051.79,1552.05 4099.79,1552.05 4102.79,1549.05 C13C.1@4149.79,1549.05 ; C30C.2@4144.79,3416.05 4144.79,3466.05 4164.79,3486.05 C29C.1@4164.79,3526.05 ; v1@4159.26,3296.53 4144.79,3282.05 C24C.2@4144.79,3246.05 4164.79,3226.05 C25C.1@4164.79,3166.05 ; v1(4224.4,1248.03) 4253.54,1248.03 4269.25,1232.32 4296.52,1232.32 C4C.1@4324.79,1204.05 ; v1@4251.79,1832.05 C3C.1@4291.79,1832.05 ; C20C.1@4259.79,2981.05 4310.79,2981.05 4330.79,3001.05 C48C.2@4369.79,3001.05 ; v1@4262.79,2671.05 4275.79,2671.05 C19C.2@4317.79,2713.05 ; C16C.2@4317.79,2393.05 4321.79,2397.05 v1@4392.79,2397.05 ; v1@4327.79,3395.05 4341.79,3381.05 C22C.1@4469.79,3381.05 ; C15C.1@4354.79,1544.05 v1@4354.79,1587.05 ; v1@4393.79,2398.05 4393.79,2469.05 C18C.2@4397.79,2473.05 ; C9C.2@4479.79,1369.05 4479.79,1212.21 v1(4481,1211) ; C21C.2@4499.79,3001.05 4532.79,3001.05 4560.79,3029.05 v1@4560.79,3085.05 ; C28C.2@4541.79,2668.05 4600.79,2727.05 v1@4600.79,2786.05 ; C10C.NEG@4589.79,1669.05 4589.79,1584.05 v1@4590.79,1583.05 ; v1@4602.79,2786.05 4604.79,2788.05 C31C.1@4651.79,2788.05 ; v1@4651.79,2439.05 C26C.2@4651.79,2488.05 ; C23C.1@4674.79,3176.05 v1(4674.79,3247.05) v1@4674.79,3248.05 ; v1@5056.28,1773.05 5083.28,1746.05 C11D.1@5083.28,1712.05 ; v1(5082.68,1248.03) 5106.28,1224.42 C5D.1@5106.28,1204.05 ; C14D.1@5083.28,1552.05 5131.28,1552.05 5134.28,1549.05 C13D.1@5181.28,1549.05 ; C30D.2@5176.28,3416.05 5176.28,3466.05 5196.28,3486.05 C29D.1@5196.28,3526.05 ; v1@5190.76,3296.53 5176.28,3282.05 C24D.2@5176.28,3246.05 5196.28,3226.05 C25D.1@5196.28,3166.05 ; v1(5255.89,1248.03) 5285.04,1248.03 5300.74,1232.32 5328.02,1232.32 C4D.1@5356.28,1204.05 ; v1@5283.28,1832.05 C3D.1@5323.28,1832.05 ; C20D.1@5291.28,2981.05 5342.28,2981.05 5362.28,3001.05 C48D.2@5401.28,3001.05 ; v1@5294.28,2671.05 5307.28,2671.05 C19D.2@5349.28,2713.05 ; C16D.2@5349.28,2393.05 5353.28,2397.05 v1@5424.28,2397.05 ; v1@5359.28,3395.05 5373.28,3381.05 C22D.1@5501.28,3381.05 ; C15D.1@5386.28,1544.05 v1@5386.28,1587.05 ; v1@5425.28,2398.05 5425.28,2469.05 C18D.2@5429.28,2473.05 ; v1(5510,1206) 5511.28,1207.28 C9D.2@5511.28,1369.05 ; C21D.2@5531.28,3001.05 5564.28,3001.05 5592.28,3029.05 v1@5592.28,3085.05 ; C28D.2@5573.28,2668.05 5632.28,2727.05 v1@5632.28,2786.05 ; C10D.NEG@5621.28,1669.05 5621.28,1584.05 v1@5622.28,1583.05 ; v1@5634.28,2786.05 5636.28,2788.05 C31D.1@5683.28,2788.05 ; v1@5683.28,2439.05 C26D.2@5683.28,2488.05 ; C23D.1@5706.28,3176.05 v1(5706.28,3247.05) v1@5706.28,3248.05 ; 2972.44,4283.46 3070.87,4283.46
  Bottom Layer (.GBL) w25: v1(1103,1542) C35.1@1145,1500 1263,1500 1341,1578 v1(1341,2153) ; C58.2@3788,843 v1(3834.16,843) C53.1@3885,843
  other v1: 2005.09,1549.32 3052.34,1549.32 4103.52,1549.32 5135.02,1549.32 2493.09,1583.32 3540.34,1583.32 4591.52,1583.32 5623.02,1583.32 2257.09,1587.32 3304.34,1587.32 4355.52,1587.32 5387.02,1587.32 2154.09,1832.32 3201.34,1832.32 4252.52,1832.32 5284.02,1832.32 2554.09,2439.32 3601.34,2439.32 4652.52,2439.32 5684.02,2439.32 2165.09,2671.32 3212.34,2671.32 4263.52,2671.32 5295.02,2671.32 2220.09,2988.32 3267.34,2988.32 4318.52,2988.32 5350.02,2988.32 2047.09,3466.32 3094.34,3466.32 4145.52,3466.32 5177.02,3466.32
ADC_DAT0: J5.154 U14.37 | length 3697.9
  Top Layer (.GTL) w5: v1(557,2676) 557.09,2676.09 U14.37@557.09,2735.24
  Bottom Layer (.GBL) w5: v1(557,2676) 519.68,2638.69 519.68,1059.06 754.74,824 1485,824 1683.5,625.5 1826.58,625.5 1826.63,625.55 2153.98,625.55 2197,582.53 2197,512.84 2211.34,498.5 2214.61,498.5 2218.41,494.7 J5.154@2218.41,461.79
ADC_DAT1: J5.152 U14.38 | length 3742.7
  Top Layer (.GTL) w5: v1(556,2642) 576.77,2662.77 U14.38@576.77,2735.24
  Bottom Layer (.GBL) w5: v1(556,2642) 532,2618 532,1062.49 761.49,833 1488.73,833 1580.5,741.23 1687.23,634.5 1822.86,634.5 1822.91,634.55 2200.73,634.55 2206,629.28 2206,608.16 2261.5,552.66 2261.5,537.34 2243.41,519.24 J5.152@2243.41,461.79
ADC_DAT2: J5.150 U14.39 | length 3740.5
  Top Layer (.GTL) w5: v1(587,2646) 596.46,2655.46 U14.39@596.46,2735.24
  Bottom Layer (.GBL) w5: v1(587,2646) 541,2600 541,1066.22 765.22,842 1492.46,842 1589.5,744.96 1690.96,643.5 1819.13,643.5 1819.18,643.55 2204.46,643.55 2215,633.01 2215,611.89 2270.5,556.39 2270.5,463.88 J5.150@2268.41,461.79
ADC_DAT3: J5.148 U14.40 | length 3749.9
  Top Layer (.GTL) w5: v1(579,2611) 579,2611.84 616.14,2648.98 U14.40@616.14,2735.24
  Bottom Layer (.GBL) w5: v1(579,2611) 550,2582 550,1069.94 768.94,851 1496.18,851 1598.5,748.68 1694.68,652.5 1815.4,652.5 1815.45,652.55 2208.18,652.55 2224,636.73 2224,615.62 2293.41,546.21 J5.148@2293.41,461.79
ADC_DAT4: J5.144 U14.41 | length 3771.3
  Top Layer (.GTL) w5: v1(611,2617) 635.83,2641.83 U14.41@635.83,2735.24
  Bottom Layer (.GBL) w5: v1(611,2617) 611,2596 559,2544 559,1073.67 772.67,860 1499.91,860 1607.5,752.41 1698.41,661.5 1811.67,661.5 1811.72,661.55 2211.91,661.55 2233,640.46 2233,619.35 2343.41,508.94 J5.144@2343.41,461.79
ADC_DAT5: J5.142 U14.42 | length 3782.3
  Top Layer (.GTL) w5: v1(615,2573) 655.51,2613.51 U14.42@655.51,2735.24
  Bottom Layer (.GBL) w5: v1(615,2573) 568,2526 568,1077.4 776.4,869 1503.64,869 1616.5,756.14 1702.14,670.5 1807.95,670.5 1807.99,670.55 2215.64,670.55 2242,644.19 2242,623.07 2368.41,496.67 J5.142@2368.41,461.79
ADC_DAT6: J5.140 U14.43 | length 3793.4
  Top Layer (.GTL) w5: v1(650,2581) 675.2,2606.2 U14.43@675.2,2735.24
  Bottom Layer (.GBL) w5: v1(650,2581) 577,2508 577,1081.13 780.13,878 1507.37,878 1625.5,759.87 1705.87,679.5 1804.22,679.5 1804.27,679.55 2219.37,679.55 2251,647.92 2251,626.8 2393.41,484.4 J5.140@2393.41,461.79
ADC_DAT7: J5.138 U14.44 | length 3827.4
  Top Layer (.GTL) w5: v1(641,2544) 641,2544.16 640.16,2545 694.88,2599.72 U14.44@694.88,2735.24
  MidLayer1 (.G1) w5: v1@640,2545 v1(641,2544)
  Bottom Layer (.GBL) w5: v1(641,2544) 628,2544 586,2502 586,1084.86 783.86,887 1511.1,887 1634.5,763.6 1709.6,688.5 1800.49,688.5 1800.54,688.55 2223.1,688.55 2260,651.64 2260,630.53 2386.83,503.7 2397.69,503.7 2406.69,494.7 2418.41,494.7 J5.138@2418.41,461.79
ASP_SEL_N: J5.43 Q1.1 U9.27 U14.72 | length 6547.8
  Top Layer (.GTL) w10: U9.27@1235.24,1675.59 1235.83,1675 1294.41,1675 v1(1295,1675.59) 1330,1675.59 1566.61,1675.59 1706,1536.2 1706,1407 1748,1365 1748,828.3 1953.3,623 v1(2313,623) ; v1(1245,2675) 1245,2734.17 U14.72@1246.06,2735.24 ; J5.43@3973.91,462.85 v1(3973.91,621.91) ; Q1.1@5443,503 5501,561 v1(5501,673)
  Bottom Layer (.GBL) w10: v1(1245,2675) 1295,2625 v1(1295,1675.59) ; v1(2313,623) 2314.09,621.91 v1(3973.91,621.91) 4631.21,621.91 4660.3,651 5479,651 v1(5501,673)
CH1_BIAS_ADJ: R6A.2 TP2A.1 U9.12 | length 2933.8
  Top Layer (.GTL) w10: v1(930,1044) 930,1543 953.74,1566.74 U9.12@953.74,1636.22 ; R6A.2@2469.09,1427.32 2569.09,1327.32 TP2A.1@2569.09,1062.32
  Bottom Layer (.GBL) w10: v1(930,1044) 1071,1044 1079,1052 1483.4,1052 1723.4,812 1786,812 1842.68,755.32 2203.8,755.32 2291,842.52 2291,898.61 2454.72,1062.32 TP2A.1@2569.09,1062.32
CH1_OUT: J5.17 U3A.3 U13A.1 | length 2753
  Top Layer (.GTL) w10: U3A.3@2177.09,1316.68 2177.09,1253.32 2179.67,1255.9 v1(2181.09,1255.9) ; v1(2507.09,1244.32) U13A.1@2507.09,1310.78 ; J5.17@4298.91,487.58 J5.17@4298.91,462.85 v1@4298.91,515.91
  MidLayer1 (.G1) w10: v1(2181.09,1255.9) 2494.51,1255.9 v1@2506.36,1244.05 ; v1@2506.59,1243.82 2847,903.42 2847,705 2965,587 3361,587 3388,560 4255,560 v1(4299,516)
CH2_BIAS_ADJ: R6B.2 TP2B.1 U9.13 | length 4010.9
  Top Layer (.GTL) w10: v1(961,1067) 961,1509 986.22,1534.22 U9.13@986.22,1603.74 ; R6B.2@3516.34,1427.32 3616.34,1327.32 TP2B.1@3616.34,1062.32
  Bottom Layer (.GBL) w10: v1(961,1067) 962,1066 1479.2,1066 1489.2,1066 1639.94,915.26 1916,915.26 1975.94,855.32 2070.4,855.32 2093.4,878.32 2250.92,878.32 2502.6,1130 2617,1130 2638,1109 2638.4,1109 2820.4,927 2923,927 2994.68,855.32 3098.66,855.32 3170.34,927 3346.65,927 3480.32,1060.68 3480.32,1062.32 TP2B.1@3616.34,1062.32
CH2_OUT: J5.13 U3B.3 U13B.1 | length 2172.6
  Top Layer (.GTL) w10: U3B.3@3224.34,1316.68 3224.34,1253.32 v1@3226.92,1255.9 ; v1(3554.34,1244.32) U13B.1@3554.34,1310.78 ; J5.13@4348.91,462.85 4348.91,518.91 v1(4349,519)
  MidLayer1 (.G1) w10: v1(3554.34,1244.32) 3542.76,1255.9 v1(3228.34,1255.9) 3249.61,1234.63 3249.61,848.39 3451,647 4221,647 v1(4349,519)